# Altium PCB PCB1.PcbDoc
Units mil, origin at the board's own origin, x right, y up, seen from the top; angles counter-clockwise.
Board outline 3937.01 x 2362.2 mil, 2 copper layers (Top Layer, Bottom Layer); 66 components, 50 nets, 242 pads, 80 vias.
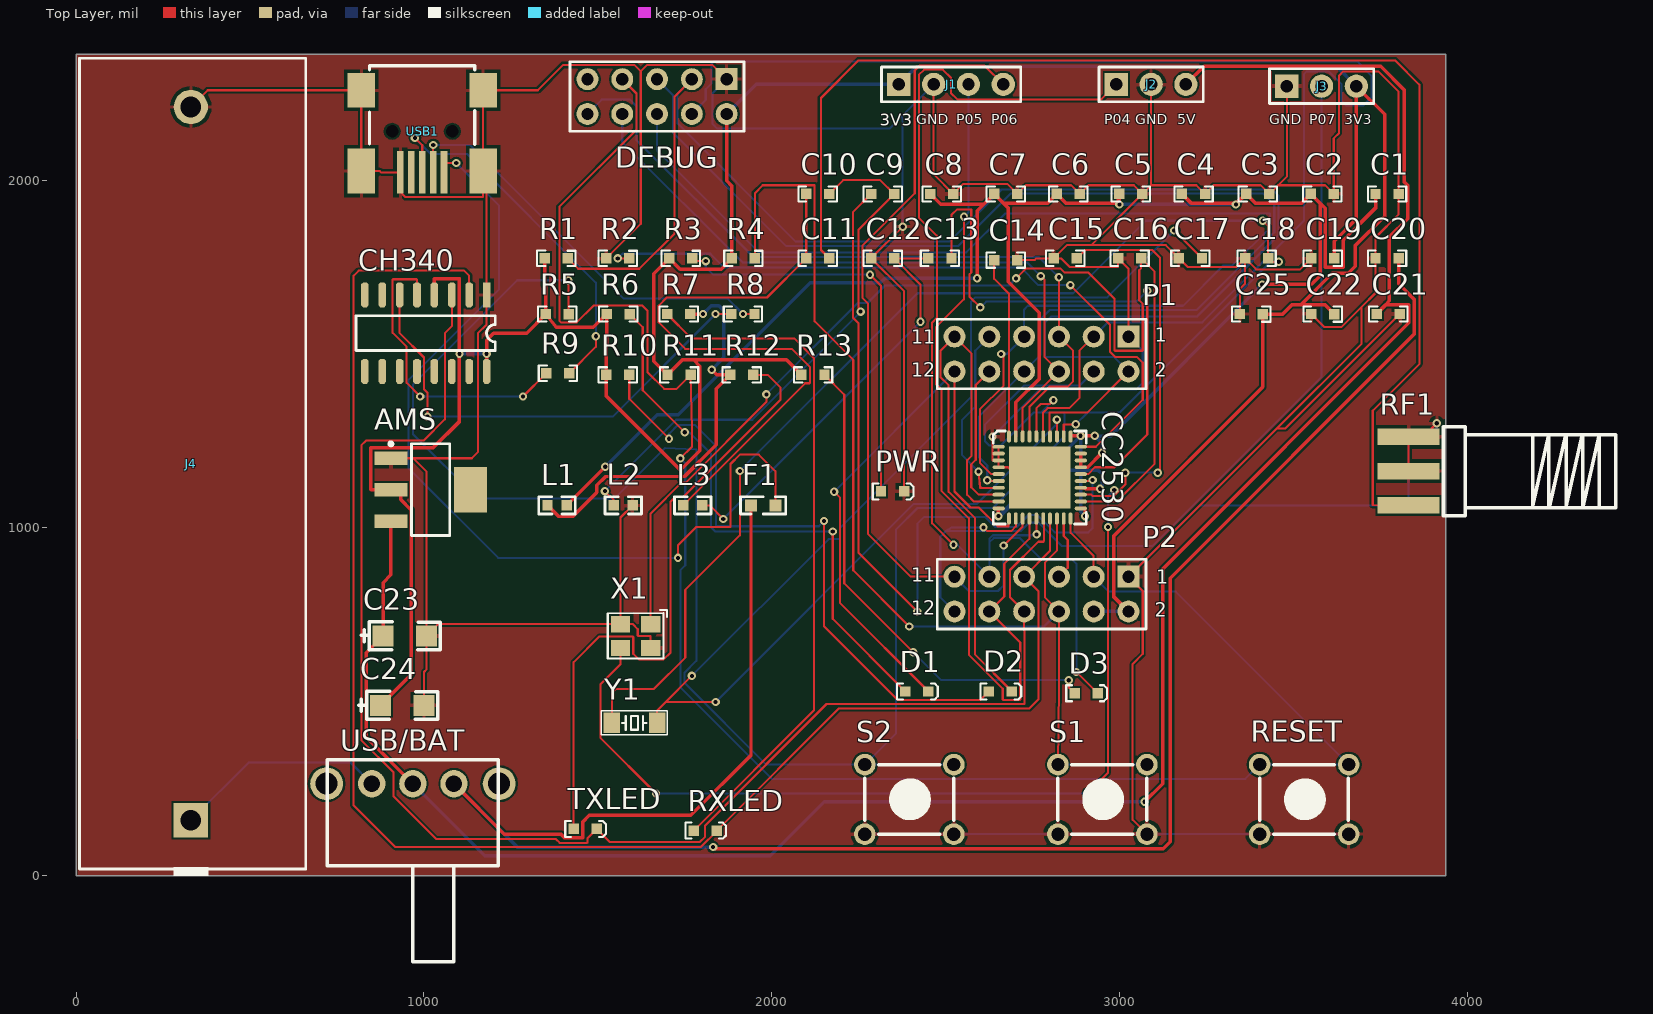
[diagram p0: Top Layer view]
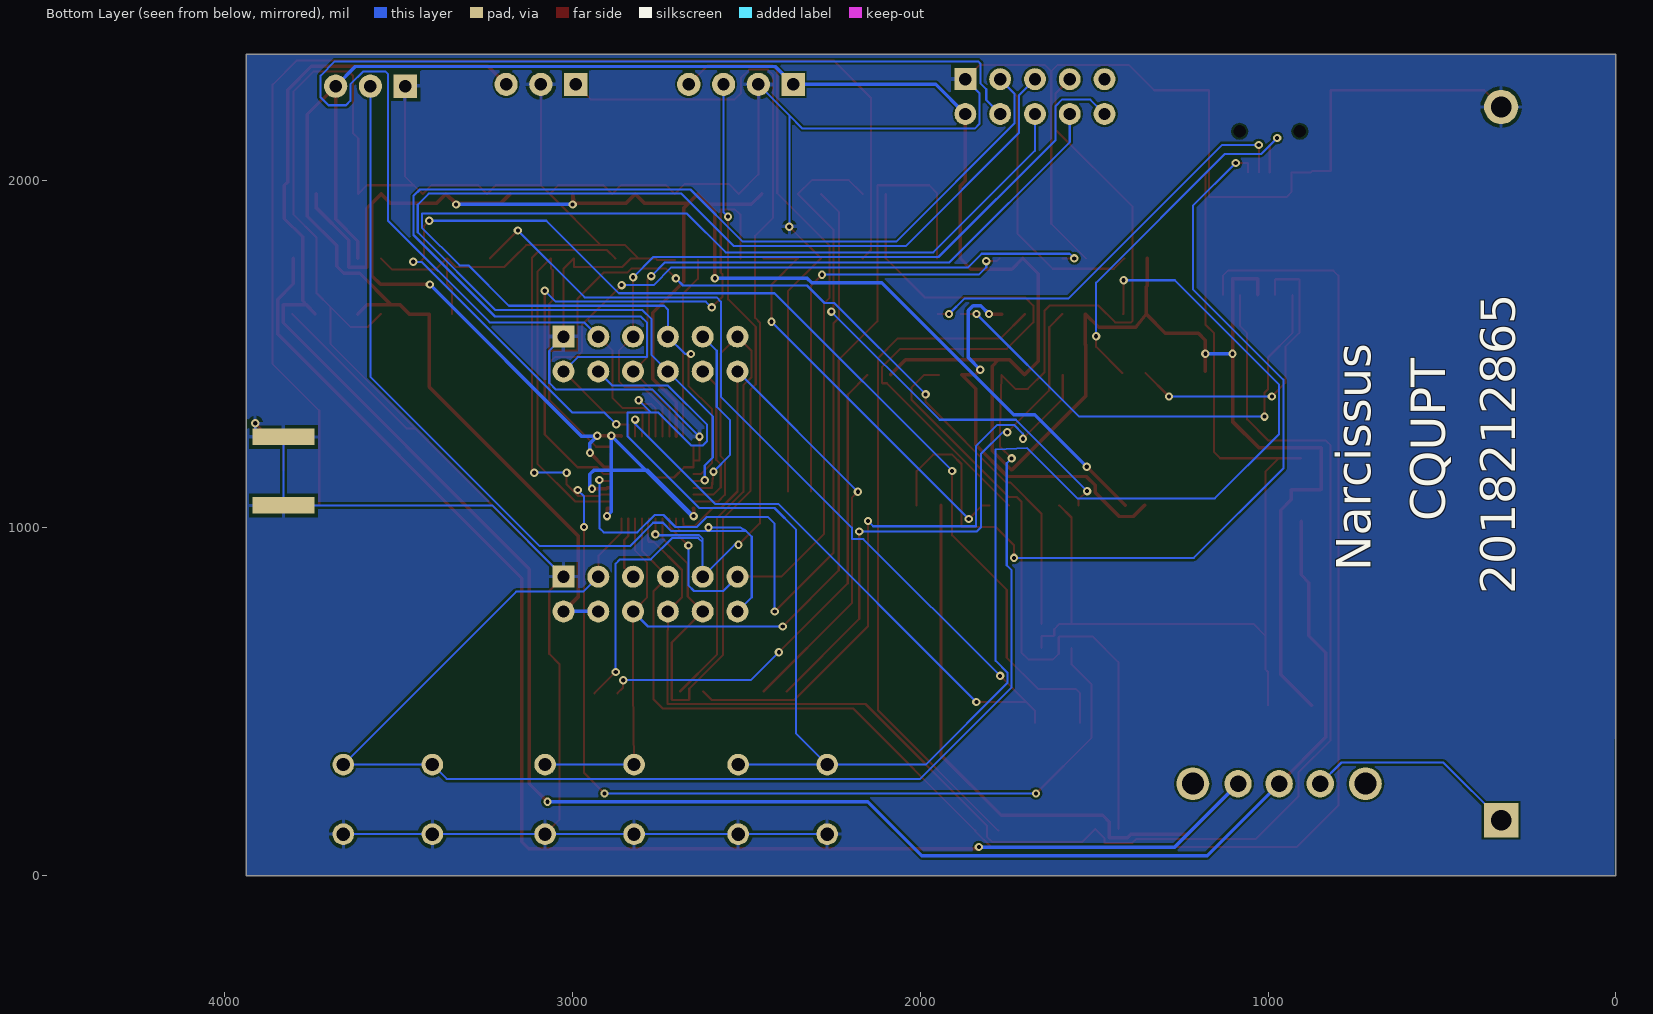
[diagram p1: Bottom Layer view, seen from below]

## Layer stack, top to bottom
Top Solder: solder mask 0.4, Solder Resist, Dk 3.5
Top Layer: signal copper 1.4
Dielectric 1: dielectric 12.6, FR-4, Dk 4.8
Bottom Layer: signal copper 1.4
Bottom Solder: solder mask 0.4, Solder Resist, Dk 3.5

## Board outline
0,0 3937.01,0 3937.01,2362.2 0,2362.2

## Design rules (kind name [scope] priority, off if disabled: settings)
Clearance [All] p1: gap=6 ignorepadtopadclearanceinfootprint=FALSE
PolygonConnect [All] p1: connectstyle=Relief reliefconductorwidth=10 reliefentries=4 polygonreliefangle="90 Angle" airgapwidth=10
RoutingVias [All] p1: holewidth=12 width=24 viastyle="Through Hole" minholewidth=10 minwidth=10 maxholewidth=24 maxwidth=50
SolderMaskExpansion [All] p1: expansion=4
Width Width_1 [(InNet('3V3') OR InNet('VBUS') OR InNet('VCC') OR InNet('VDD3V3') OR InNet('VDD5V'))] p1: maxlimit=10 minlimit=10 preferedwidth=10
Width [All] p2: maxlimit=10 minlimit=6 preferedwidth=6
30 further rules are at their usual default settings.

## Components (designator, comment, footprint, x,y, rotation, side; value= is the part's Value field where it differs from the comment)
AMS "AMS1117" SOT-223-4 905,1200.55 r270 top (schematic designator IC2)
C1 "1uF" C0603 3768.16,1959.97 r0 top
C2 "0.1uF" C0603 3581.84,1960.03 r0 top
C3 "0.1uF" C0603 3396.84,1960.03 r0 top
C4 "0.1uF" C0603 3211.84,1960.03 r0 top
C5 "0.1uF" C0603 3031.84,1960.03 r0 top
C6 "220pF" C0603 2851.84,1960.03 r0 top
C7 "0.1uF" C0603 2671.84,1960.03 r0 top
C8 "2.2uF" C0603 2488.16,1959.97 r0 top
C9 "18pF" C0603 2318.16,1959.97 r0 top
C10 "1pF" C0603 2131.84,1960.03 r180 top
C11 "2.2pF" C0603 2131.84,1775.03 r180 top
C12 "1pF" C0603 2318.16,1774.97 r0 top
C13 "18pF" C0603 2483.16,1774.97 r180 top
C14 "1uF" C0603 2671.84,1770.03 r0 top
C15 "27pF" C0603 2843.16,1774.97 r180 top
C16 "27pF" C0603 3028.16,1774.97 r180 top
C17 "15pF" C0603 3203.16,1774.97 r180 top
C18 "15pF" C0603 3393.16,1774.97 r180 top
C19 "0.1uF" C0603 3583.16,1774.97 r180 top
C20 "0.1uF" C0603 3768.16,1774.97 r180 top
C21 "1uF" C0603 3771.84,1615.03 r0 top
C22 "22pF" C0603 3583.16,1614.97 r180 top
C23 "10uF" CASE-A_3216 945,690 r0 top
C24 "10uF" CASE-A_3216 937.5,490 r0 top
C25 "0.01uF" C0603 3378.16,1614.97 r180 top
CC2530 "CC2530F256" PVQFN-N40 2651.95,1233.58 r0 top (schematic designator IC1)
CH340 "CH340G" SOP16 1180,1670 r180 top
D1 "LED" LED_0603 2416.84,530.03 r0 top
D2 "LED" LED_0603 2656.84,530.03 r0 top
D3 "LED" LED_0603 2903.16,524.97 r0 top
DEBUG "Debug" HDR2.54-LI-2x5P 1670,2240 r180 top (schematic designator P3)
F1 "6V 500MA" "FU 0603" 1975,1065 r0 top
J1 "气体感应" HDR2.54-M-LI-4P 2515,2275 r0 top
J2 "光敏/热敏/继电器" HDR2.54-M-LI-3P 3090,2275 r0 top
J3 "温湿度感应" HDR2.54-M-LI-3P 3580,2270 r0 top
J4 "CON2" 5557-2P 330,160 r90 top
L1 "2nH" 0402 1355,1065 r0 top
L2 "2nH" 0402 1600,1065 r180 top
L3 "2nH" 0402 1745,1065 r0 top
P1 "Header 6X2" HDR2.54-LI-2x6P 2775,1500 r180 top
P2 "Header 6X2" HDR2.54-LI-2x6P 2775,810 r180 top
PWR "LED" LED_0603 2346.84,1105.03 r0 top
R1 "10K" R0603 1380,1775 r0 top
R2 "56K" R0603 1556.84,1775.03 r0 top
R3 "1K" R0603 1738.16,1774.97 r0 top
R4 "10K" R0603 1918.16,1774.97 r0 top
R5 "10K" R0603 1383.16,1614.97 r0 top
R6 "1K" R0603 1558.16,1614.97 r0 top
R7 "1K" R0603 1731.84,1615.03 r0 top
R8 "0R" R0603 1916.84,1615.03 r0 top
R9 "0R" R0603 1385,1445 r0 top
R10 "1K" R0603 1556.84,1440.03 r0 top
R11 "10K" R0603 1733.16,1439.97 r0 top
R12 "1K" R0603 1913.16,1439.97 r180 top
R13 "1K" R0603 2118.16,1439.97 r0 top
RESET "KEY_4P" KEY_6*6 3530,220 r0 top (schematic designator S4)
RF1 "SMA偏角插座" SMA-SMD_HJ-SMA716 3830,1163.43 r90 top
RXLED "LED" LED_0603 1808.16,129.97 r0 top
S1 "KEY_4P" KEY_6*6 2950,220 r0 top
S2 "KEY_4P" KEY_6*6 2395,220 r0 top
TXLED "LED" LED_0603 1463.16,134.97 r0 top
USB1 "Mini USB" "SMT-MINI USB" 995,2140 r270 top
USB/BAT "SW-SPDT" SS-12F23 968.11,265 r270 top (schematic designator S3)
X1 "32MHz" OSC-SMD_4P-L3.2-W2.5-BL 1608.3,689.46 r180 top
Y1 "32K" "OSC 3215-2P" 1604.96,440 r180 top

## Footprints (in the part's own frame and the unit in brackets; to place one, negate y for a bottom-side part, rotate by r counter-clockwise, add the part's x,y. Pads: shape width x height; smd on the part's side, far side on the other; paste and mask are expansions set on the pad)
0402 [mil]
  rect 30x30 smd: 1(0,0) 2(55,0)
  silkscreen extent -25,-25 80,25
5557-2P [mm] "pin 4.2mm"
  rect 2.5x2.5 hole 1.5: 1(0,0)
  round 2.5 hole 1.5: 2(52.07,0)
  silkscreen extent -4.06,-8.38 55.63,8.13
C0603 [mil]
  rect 30x30 smd: 1(-33.16,0.03) 2(33.16,-0.03)
  silkscreen extent -55,-22 55,22, body extent -31,-15 32,17, height 12
CASE-A_3216 [mil]
  rect 60x60 smd: 1(-62.5,0) 2(62.5,0)
  silkscreen extent -125,-40 102,40, body extent -72,-32 78,31, height 63
"FU 0603" [mil] "贴片保险丝"
  rect 35x35 smd: 1(-35,0) 2(35,0)
  silkscreen extent -65,-25 65,25, body extent -31,-16 31,16, height 20
HDR2.54-LI-2x5P [mm] "双排排针，5x2脚 淘宝ID:黄晶宝石   店铺网址:https://shop463601444.taobao.com"
  rect 1.6x1.6 hole 0.9: 1(-5.08,-1.27)
  round 1.6 hole 0.9: 2(-5.08,1.27) 3(-2.54,-1.27) 4(-2.54,1.27) 5(0,-1.27) 6(0,1.27) 7(2.54,-1.27) 8(2.54,1.27) 9(5.08,-1.27) 10(5.08,1.27)
  silkscreen extent -6.35,-2.54 6.35,2.54, body extent -6.35,-2.54 6.35,2.54, height 8.5
HDR2.54-LI-2x6P [mm] "双排排针，6x2脚 淘宝ID:黄晶宝石   店铺网址:https://shop463601444.taobao.com"
  rect 1.6x1.6 hole 0.9: 1(-6.35,-1.27)
  round 1.6 hole 0.9: 2(-6.35,1.27) 3(-3.81,-1.27) 4(-3.81,1.27) 5(-1.27,-1.27) 6(-1.27,1.27) 7(1.27,-1.27) 8(1.27,1.27) 9(3.81,-1.27) 10(3.81,1.27) 11(6.35,-1.27) 12(6.35,1.27)
  silkscreen extent -7.62,-2.54 7.62,2.54, body extent -7.62,-2.54 7.62,2.54, height 8.5
HDR2.54-M-LI-3P [mm] "排母，3脚   淘宝ID:黄晶宝石   店铺网址:https://shop463601444.taobao.com"
  rect 1.7x1.7 hole 0.9: 1(-2.54,0)
  round 1.7 hole 0.9: 2(0,0) 3(2.54,0)
  silkscreen extent -3.81,-1.27 3.81,1.27, body extent -3.81,-1.27 3.81,1.27, height 8.5
HDR2.54-M-LI-4P [mm] "排母，4脚  淘宝ID:黄晶宝石   店铺网址:https://shop463601444.taobao.com"
  rect 1.7x1.7 hole 0.9: 1(-3.81,0)
  round 1.7 hole 0.9: 2(-1.27,0) 3(1.27,0) 4(3.81,0)
  silkscreen extent -5.08,-1.27 5.08,1.27, body extent -5.08,-1.27 5.08,1.27, height 8.5
KEY_6*6 [mil]
  round 62 hole 38: 1(-127.95,100) 1(127.95,100) 2(-127.95,-100) 2(127.95,-100)
  silkscreen extent -128,-100 127,100, body extent -132,-123 126,121, height 197
LED_0603 [mil]
  rect 30x30 smd: 1(-33.15,0.03) 2(33.16,-0.03)
  silkscreen extent -57,-23 60,23, body extent -32,-15 31,16, height 18
"OSC 3215-2P" [mm] "3.2*1.5*0.6mm(长宽高)                      淘宝ID:黄晶宝石"
  rect 1.2x1.5 smd: 1(-1.65,0) 2(1.65,0)
  silkscreen extent -2.41,-0.89 2.41,0.89, body extent -1.6,-0.75 1.6,0.75, height 0.61
OSC-SMD_4P-L3.2-W2.5-BL [mm]
  rect 1.4x1.2 smd: 1(-1.1,-0.875) 2(1.1,-0.875) 3(1.1,0.875) 4(-1.1,0.875)
  silkscreen extent -2.29,-1.9 2.03,1.65
PVQFN-N40 [mm]
  oval 0.889x0.28 smd: 1(0,0) 2(0,-0.5) 3(0,-1) 4(0,-1.5) 5(0,-2) 6(0,-2.5) 7(0,-3) 8(0,-3.5) 9(0,-4) 10(0,-4.5) 21(5.994,-4.5) 22(5.994,-4) 23(5.994,-3.5) 24(5.994,-3) 25(5.994,-2.5) 26(5.994,-2) 27(5.994,-1.5) 28(5.994,-1) 29(5.994,-0.5) 30(5.994,0)
  oval 0.28x0.889 smd: 11(0.748,-5.248) 12(1.248,-5.248) 13(1.748,-5.248) 14(2.248,-5.248) 15(2.748,-5.248) 16(3.248,-5.248) 17(3.748,-5.248) 18(4.248,-5.248) 19(4.748,-5.248) 20(5.248,-5.248) 31(5.248,0.749) 32(4.748,0.749) 33(4.248,0.749) 34(3.748,0.749) 35(3.248,0.749) 36(2.748,0.749) 37(2.248,0.749) 38(1.748,0.749) 39(1.248,0.749) 40(0.748,0.749)
  rect 4.5x4.5 smd: 41(2.998,-2.25)
  silkscreen extent -0.4,-5.65 6.4,1.15
R0603 [mil]
  rect 30x30 smd: 1(-33.16,0.03) 2(33.16,-0.03)
  silkscreen extent -55,-22 55,22, body extent -32,-15 31,16, height 18
SMA-SMD_HJ-SMA716 [mm]
  rect 1.2x4.5 smd: 1(0,0) 2(-2.5,0) 3(2.5,0)
  rect 1.2x4.5 smd far side: 4(-2.5,0) 5(2.5,0)
  silkscreen extent -3.25,-15.14 3.25,-2.54
"SMT-MINI USB" [mm]
  rect 3.1x0.5 smd: 1(3,1.6) 2(3,0.8) 3(3,0) 4(3,-0.8) 5(3,-1.6)
  rect 3.3x2 smd: 6(2.9,-4.45) 8(2.9,4.45)
  rect 2.5x2 smd: 7(-3,-4.45) 9(-3,4.45)
  rect 0x0 hole 0.9: 10(0,2.2) 11(0,-2.2)
  silkscreen extent -4.8,-3.85 0.95,3.85
SOP16 [mil]
  rect 22x72 smd: 1(0,0)
  oct 22x72 smd: 2(50,0) 3(100,0) 4(150,0) 5(200,0) 6(250,0) 7(300,0) 8(350,0) 9(350,220) 10(300,220) 11(250,220) 12(200,220) 13(150,220) 14(100,220) 15(50,220) 16(0,220)
  silkscreen extent -25,60 375,160
SOT-223-4 [mm] "SOT223, 4-Leads, Body 6.50x7.00mm (avg), Pitch 2.30mm, IPC Medium Density"
  rect 1x2.4 smd: 1(0,0) 2(2.3,0) 3(4.6,0)
  rect 3.3x2.4 smd: 4(2.3,5.8)
  silkscreen extent -1.17,-0.12 5.65,4.3, body extent -1.05,1.05 5.65,4.75, height 1.8
SS-12F23 [mm] "脚距3mm"
  round 2.4 hole 1.6: 0(0,6.3) 0(0,-6.3)
  round 2 hole 1.2: 1(0,3) 2(0,0) 3(0,-3)
  silkscreen extent -1.75,-6.25 13,6.25, body extent -0.61,-6.52 12.29,6.48, height 5.75

## Part data
C1 C2 C3 C4 C5 C6 C7 C8 C9 C10 C11 C12 C13 C14 C15 C16 C17 C18 C19 C20 C21 C22 C25: library part CAP, "Capacitor"
C23 C24: library part "Cap Pol2", "钽电容"
CC2530: library part CC2530
DEBUG: library part "Header 5X2", "Header, 5-Pin, Dual row"
F1: library part FUSE, "保险丝"
J1: library part CON4, "连接器"
J2 J3: library part CON3, "连接器"
J4: "连接器"
L1 L2 L3: library part INDUCTOR
P1 P2: "Header, 6-Pin, Dual row"
R1 R3 R4 R5 R6 R7 R8 R9 R10 R11 R12 R13: library part RES2
R2: library part RES
RESET S1 S2: "轻触按键4P"
RF1: BOM_Manufacturer Part=间距1.6MM, BOM_Supplier Part=https://detail.tmall.com/item.htm?spm=a1z10.3-b.w4011-9244759072.35.2c2a2fb4qDqj1h&id=529515511096&rn=ee1f73c36cd3b95b005e96697d488f37&abbucket=11&skuId=3191543860831, Contributor=NarcissusLZ, spicePre=R, spiceSymbolName=SMA偏角插座
USB1: library part USB-1, "IC", Manufacturer Part Number="USB Plug P/N: MUSB-B5-S-VT-02", ComponentLink1Description="Manufacturer Link", Published=NOV.13,2009, Publisher1="Stephen Lui", Publisher2=Tianshen
USB/BAT: "拨动开关", ComponentLink1Description="Manufacturer Link", ComponentLink1URL=http://www.apem.com, DatasheetVersion=05-Dec-2000, LatestRevisionDate=17-Dec-2003, LatestRevisionNote="Schematic revised, PCB Footprint replaced.", PackageDescription="Switch; 4 Leads", PackageReference=TL36WW15050, Published=24-Mar-1999, Publisher="Altium Limited"
X1: BOM_Manufacturer Part="32Mhz (5个)", BOM_Supplier Part=https://detail.tmall.com/item.htm?spm=a1z10.3-b-s.w4011-21581912015.62.25615535szrVfW&id=524364517124&rn=6fc20a06caf5be9e882cd070f02ad4b3&abbucket=11&skuId=3184916323459, nameAlias=Frequency, spicePre=X, spiceSymbolName=X322532MOB4SI
Y1: library part CRYSTAL, "Crystal"
CH340: 唯一出售店铺网址=https://shop463601444.taobao.com, 技术支持，联系售后="封装库来自淘宝卖家 ID：黄"

## Via types
v1: diameter 24, hole 12, Top Layer to Bottom Layer, 80 vias

## Nets (pads, with @x,y where several pads share a name; then routed paths per layer and width w, separated by ;. In a path a pad name is that pad's centre, name@x,y a point inside that pad or via, vN(x,y) a via of type N, cw(c..) or ccw(c..) an arc to the next point about the centre after c; other vN are vias at no path point)
3V3: C1.1 C2.1 C3.1 C4.1 C5.1 C6.1 C7.1 C8.1 CC2530.10 CC2530.21 CC2530.24 CC2530.27 CC2530.28 CC2530.29 CC2530.31 CC2530.39 L1.2 | length 6760.3
  Top Layer w10: L1.2 v1(1521,1176) ; C8.1 2485,1930 2608.63,1930 ; v1(2590,1718) 2590,1911.37 2608.63,1930 ; v1(2651,1034) 2651,1056.42 CC2530.10 ; CC2530.39 2701.1,1361.21 2768,1428.11 2768,1618.25 2678.97,1707.28 2678.97,1919.78 2664.75,1934 ; CC2530.31 2858.58,1265 v1(2887.5,1265) v1(2928,1265) ; CC2530.21 2900,1056.42 v1(2900,1034) ; CC2530.24 2899,1115.47 2901.47,1113 v1(2943,1113) ; CC2530.29 CC2530.28 CC2530.27 2907.53,1174.53 v1(2949,1216) ; v1(2998.69,1930) C5.1 2994.69,1934 2844.75,1934 C6.1 2792.63,1934 2664.75,1934 ; C4.1 3204.75,1934 3333.63,1934 C3.1 ; v1(3333.63,1930) C3.1 ; v1(3409,1700) 3551,1700 3576,1725 3576,1932.75 ; C1.1 3735,1919.69 3642.31,1827 3642.31,1750 3641.25,1748.94 3591,1748.94 3590,1749.94 3590,1918.75 3576,1932.75 ; 2608.63,1930 C7.1 2664.75,1934 ; C3.1 3389.75,1934 3522.63,1934 C2.1 3576,1932.75
  Bottom Layer w10: v1(1521,1176) 1671,1326 1731,1326 2110,1705 2312,1705 2325,1718 v1(2590,1718) ; v1(2900,1034) 2887.5,1046.5 2887.5,1166.5 ; v1(2928,1265) v1@2930,1263 ; v1(2943,1113) 2950,1120 2950,1154 2937.5,1166.5 2887.5,1166.5 ; v1(2949,1216) 2949,1244 v1@2930,1263 ; v1(2998.69,1930) v1(3333.63,1930) ; v1(3409,1700) 2972,1263 v1@2930,1263 ; 2789,1166.5 v1(2887.5,1265) 2887.5,1166.5 ; 2789,1166.5 2656.5,1034 v1(2651,1034) 2783.5,1166.5 2789,1166.5 ; 2789,1166.5 2887.5,1166.5
GND: AMS.1 C1.2 C2.2 C3.2 C4.2 C5.2 C6.2 C7.2 C8.2 C12.1 C14.2 C15.2 C16.2 C17.2 C18.2 C19.2 C20.2 C21.2 C22.2 C23.2 C24.2 C25.2 CC2530.1 CC2530.2 CC2530.3 CC2530.4 CC2530.41 CH340.1 DEBUG.1 J1.2 J2.2 J3.1 J4.2 L2.1 P1.1 P2.1 PWR.2 R2.1 RESET.2 RF1.1 RF1.3 RF1.4 RF1.5 S1.2 S2.2 USB1.5 USB1.6 USB1.7 USB1.8 USB1.9 X1.2 X1.4 | length 19036.9
  Top Layer w6: J4.2 378.11,2258.11 USB1.7 USB1.6 873,2025.83 876.94,2021.89 USB1.5 932.01,1965.99 947,1951 1169.2,1951 1170.2,1952 USB1.8 ; AMS.1 968.95,1200.55 ; C24.2 1000,586 1007.5,593.5 C23.2 ; R2.1 1570.22,1821.59 1623,1874.37 1623,2312.5 ; L2.1 1565,1030 X1.2 ; X1.4 1651.61,689 1650.61,690 1615.56,690 1614.56,691 1614.56,709.33 1600,723.9 X1.2 ; DEBUG.1 1829,2331 1641.5,2331 1623,2312.5 ; v1(2376,1866) C12.1 2380,1680 PWR.2 ; J1.2 2465,2016.25 C8.2 2550.38,1989 2676,1989 C7.2 2730,1985 2860,1985 C6.2 2910,1985 3040,1985 C5.2 ; v1(2634,1262.5) 2634,1194.21 CC2530.3 ; CC2530.1 CC2530.2 CC2530.3 ; C14.2 2755,1770 2760,1775 C15.2 ; CC2530.41 2707.53,1145 2678,1174.53 CC2530.4 CC2530.3 ; P1.1 3025,1745 C16.2 2995,1751 2994,1750 2856,1750 2831,1775 C15.2 ; S1.2@3077.95,120 3037,160.95 3037,609 3066,638 3066,819 P2.1 3450.91,1285.91 ; J2.2 3090,1985 ; C25.2 3345,1687 3360,1702 C18.2 ; J3.1 3480,2010 3455,1985 ; C22.2 3587,1578 3637.5,1578 3695,1635.5 ; C19.2 3518.19,1743.19 3391.81,1743.19 C18.2 ; C21.2 3475.91,1285.91 3450.91,1285.91 ; RF1.1 RF1.3 3896,1261.85 3896,1286 v1(3911,1301) ; 968.95,1200.55 1137.5,1200.55 1155,1218.05 1155,1560 1180,1585 CH340.1 1180,2016.02 USB1.8 ; 968.95,1200.55 1007.5,1162 C23.2 ; C23.2 1041.4,723.9 X1.2 ; USB1.8 USB1.9 1327.11,2258.11 1400,2331 1604.5,2331 1623,2312.5 ; C15.2 2848,1813 2918,1813 ; 2918,1813 3132,1813 C17.2 3195,1750 3335,1750 C18.2 ; 2918,1813 C5.2 ; C5.2 3090,1985 ; 3090,1985 3220,1985 C4.2 3270,1985 3405,1985 C3.2 3455,1985 ; 3450.91,1285.91 3695,1530 3695,1635.5 ; 3455,1985 3590,1985 C2.2 3615,2120 3630,2135 3630,2300 3642.5,2312.5 3743,2312.5 3801.31,2254.19 C1.2 3801.31,1901.31 3735,1835 C20.2 3735,1675.5 3695,1635.5
  Bottom Layer w6: DEBUG.1 1829,2249 1829,2162.5 1843.5,2148 2338,2148 2376,2186 ; S2.2@2267.05,120 2522.95,120 2822.05,120 3077.95,120 3402.05,120 RESET.2@3657.95,120 ; v1(2376,1866) 2376,2186 ; J1.2 2376,2186 ; v1(2634,1262.5) 2769,1397.5 3046.5,1397.5 3066,1417 3066,1509 P1.1 ; P2.1 3230,1065 RF1.4 RF1.5 3911,1261.85 v1(3911,1301)
NetC9_1: C9.1 CC2530.25 | length 2287.6
  Top Layer w6: C9.1 2233.71,1908.71 2233.71,1603.72 2249,1588.43 2249,929 v1(2418,760) ; CC2530.25 2919.16,1135.16 v1(2922,1138)
  Bottom Layer w6: v1(2418,760) 2418,1012.5 2437.5,1032 2612.5,1032 2641.5,1003 2703,1003 2737.5,1037.5 2762.5,1037.5 2812.5,987.5 2909.5,987.5 2922,1000 v1(2922,1138)
NetC9_2: C9.2 C10.1 L2.2 | length 1602.4
  Top Layer w6: v1(1520,1106) 1545,1081 L2.2 ; C10.1 2205,2000 2311.25,2000 C9.2 2249,1857.62 2249,1628 v1(2255,1622)
  Bottom Layer w6: v1(1520,1106) 1725,1311 1944,1311 v1(2255,1622)
NetC10_2: C10.2 C11.2 L3.1 | length 1756.5
  Top Layer w6: L3.1 2096,1416 2108,1416 2109,1417 2109,1463 2057,1515 1750.69,1515 1674.69,1591 1674.69,1639 1698.19,1662.5 1986.13,1662.5 C11.2 C10.2
NetC11_1: C11.1 RF1.2 | length 3631.2
  Top Layer w6: C11.1 2141,1799 2141,2236 2249,2344 3791.1,2344 3861,2274.1 3861,1471 3727,1337 3727,1066 RF1.2
NetC12_2: C12.2 C13.2 L3.2 | length 1190
  Top Layer w6: L3.2 1821,1065 v1(1860,1026) ; v1(2427,1593) 2427,1699.25 C12.2 2400,1774.94 2400.06,1775 C13.2
  Bottom Layer w6: v1(1860,1026) v1(2427,1593)
NetC13_1: C13.1 CC2530.26 | length 1636.1
  Top Layer w6: C13.1 2516.31,1900 2532.31,1916 2572,1916 2573,1915 2573,1734 2568,1729 2568,1665 v1(2599,1634) ; CC2530.26 2908.84,1154.84 2928.47,1174.47 2984.76,1174.47 3079,1268.71 v1(3079,1682)
  Bottom Layer w6: v1(2599,1634) 2615.68,1650.68 3047.68,1650.68 v1(3079,1682)
NetC14_1: C14.1 CC2530.40 | length 524.7
  Top Layer w6: C14.1 2638.69,1716.19 2681.42,1673.46 CC2530.40
NetC15_1: C15.1 CC2530.23 X1.3 | length 3817.6
  Top Layer w6: X1.3 1565,608 1507,550 1507,397 v1(1667,237) ; C15.1 2900.38,1799 3093,1799 3116,1776 3116,1166 v1(3109,1159) ; CC2530.23 2918,1095.79 2921.79,1092 2983,1092 2984,1093 ; v1(2907,237) 2966,296 v1(2966,1003) ; v1(2984,1109) 2984,1093 ; v1(3016,1159) 3016,1125 2984,1093
  Bottom Layer w6: v1(1667,237) v1(2907,237) ; v1(2966,1003) 2966,1091 v1(2984,1109) ; v1(3016,1159) v1(3109,1159)
NetC16_1: C16.1 CC2530.22 X1.1 | length 3355.8
  Top Layer w6: X1.1 1651.61,1041.61 1741.29,1131.29 1753.34,1131.29 1984.31,1362.26 v1(1984.31,1384) ; v1(2702,1717.5) 2730,1745.5 2830,1745.5 2841.5,1734 2910,1734 2984.5,1659.5 2984.5,1511 2986,1509.5 3065,1509.5 3066,1510.5 3066,1644.14 3056,1654.14 3056,1741 3061.31,1746.31 C16.1 3100,1736.25 3100,1184.43 2991.67,1076.1 CC2530.22
  Bottom Layer w6: v1(1984.31,1384) 2246.98,1646.67 2274.67,1646.67 2325,1697 2681.5,1697 v1(2702,1717.5)
NetC17_1: C17.1 CC2530.33 Y1.1 | length 3900.7
  Top Layer w6: Y1.1 1669.92,474.92 1695,500 ; v1(1770,575) 1695,500 ; v1(1838.31,500) 1695,500 ; CC2530.33 v1(2819.21,1311.5) ; v1(3156.25,1855) C17.1
  Bottom Layer w6: v1(1770,575) 2163.04,968.04 2195,968.04 2196,969.04 2196,1001 2572.5,1377.5 2572.5,1650.2 2584.98,1662.68 2963.92,1662.68 v1(3156.25,1855) ; v1(1838.31,500) 2407.81,1069.5 2589.71,1069.5 2819.21,1299 v1(2819.21,1311.5)
NetC18_1: C18.1 CC2530.32 Y1.2 | length 3735.5
  Top Layer w6: Y1.2 1540,525 1552.5,537.5 1661,537.5 1751,627.5 1751,822 1908,979 v1(1908,1164) ; CC2530.32 2838.9,1297 v1(2873.5,1298) ; v1(3411,1883) 3426.31,1867.69 C18.1 3436.25,1765 v1(3457,1765)
  Bottom Layer w6: v1(1908,1164) 2418.69,1674.69 2866,1674.69 3074.31,1883 v1(3411,1883) ; v1(2873.5,1298) 2907.5,1332 3000,1332 3433,1765 v1(3457,1765)
NetD1_1: D1.1 R6.2 | length 1618.7
  Top Layer w6: R6.2 1628.78,1577.47 1628.78,1395.72 v1(1749.5,1275) ; v1(2175,990) 2175,738.75 D1.1
  Bottom Layer w6: v1(1749.5,1275) 1763,1275 1825,1213 1825,1002.5 1837.5,990 v1(2175,990)
NetD2_1: D2.1 R10.2 | length 1837.2
  Top Layer w6: R10.2 1590,1371 v1(1704.5,1256.5) ; v1(2150,1020) 2150,717 2361,506 2599.63,506 D2.1
  Bottom Layer w6: v1(1704.5,1256.5) 1704.5,1271 1730,1296.5 1778.5,1296.5 1839,1236 1839,1006 1840,1005 2135,1005 v1(2150,1020)
NetD3_1: D3.1 R13.2 | length 1427.6
  Top Layer w6: R13.2 2208,1383.25 2208,841 v1(2406,643) ; v1(2853.5,562.5) 2853.5,541.5 D3.1
  Bottom Layer w6: v1(2406,643) 2486.5,562.5 v1(2853.5,562.5)
NetF1_2: F1.2 USB1.1 | length 2627
  Top Layer w6: USB1.1 1057.99,2049 v1(1093,2049) ; v1(1730,914) 1730,950 1783,1003 1880,1003 1881,1004 1881,1184.03 1907.97,1211 1962.5,1211 2010,1163.5 F1.2
  Bottom Layer w6: v1(1093,2049) 1216,1926 1216,1686 956,1426 956,1171 1213,914 v1(1730,914)
NetIC1_30: CC2530.30 R2.2 | length 2062.9
  Top Layer w6: v1(1557,1775) R2.2 ; v1(2858,1698) 2972,1584 2972,1506.5 2987.5,1491 3050,1491 3066,1475 3066,1368.68 2930.9,1233.58 CC2530.30
  Bottom Layer w6: v1(1557,1775) 1570.15,1788.15 1823,1788.15 1861.94,1749.21 2714.79,1749.21 2766,1698 v1(2858,1698)
NetJ4_1: J4.1 USB/BAT.3 | length 614
  Bottom Layer w6: J4.1 496,326 789,326 USB/BAT.3
NetPWR_1: PWR.1 R3.2 | length 1176.7
  Top Layer w6: R3.2 1779.25,1767 v1(1810,1767) ; v1(2282,1728) 2313.69,1696.31 PWR.1
  Bottom Layer w6: v1(1810,1767) 1810,1749 1831,1728 v1(2282,1728)
NetR7_1: R7.1 RXLED.1 | length 1976.3
  Top Layer w6: R7.1 1768.75,1545 2064,1545 2121,1488 2121,476 RXLED.1
NetR8_2: R8.2 USB1.2 | length 1203.9
  Top Layer w6: USB1.2 v1(1026.5,2101) ; v1(1917,1615) R8.2
  Bottom Layer w6: v1(1026.5,2101) 1132,2101 1573,1660 1872,1660 v1(1917,1615)
NetR9_2: R9.2 USB1.3 | length 1091.6
  Top Layer w6: v1(974,2121) 995,2100 USB1.3 ; R9.2 1494,1520.81 v1(1494,1551)
  Bottom Layer w6: v1(974,2121) 1020,2075 1124,2075 1494,1705 v1(1494,1551)
NetR12_1: R12.1 TXLED.1 | length 1851
  Top Layer w6: TXLED.1 1430,614 1504,688 1599.62,688 1601.56,686.06 1601.56,638.44 1617.62,622.38 1689,622.38 1708.53,641.91 1708.53,1075.53 1722,1089 1744.82,1089 2025,1369.18 2025,1403.18 1988.25,1439.94 R12.1
P0_0: CC2530.19 P2.5 | length 182.4
  Top Layer w6: P2.5 2850.52,885.52 2850.52,965.38 2838.9,977 CC2530.19
P0_1/BTN1: CC2530.18 P2.6 R4.2 S1.1 | length 3190.5
  Top Layer w6: R4.2 1951.31,1962.5 1973.81,1985 2122,1985 2123,1984 2123,1594 2233.94,1483.06 2233.94,878.06 v1(2395,717) ; CC2530.18 2819.21,934.71 2784.5,900 2784.5,800.5 P2.6 2825,542.95 S1.1@2822.05,320
  Bottom Layer w6: v1(2395,717) 2782,717 P2.6 ; S1.1@2822.05,320 S1.1@3077.95,320
P0_2/RX: CC2530.17 CH340.2 P2.7 RXLED.2 | length 4683.2
  Top Layer w6: CH340.2 1130,1725 1115.5,1739.5 812.5,1739.5 798,1725 798,202.5 917.5,83 1795.62,83 1841.31,128.69 RXLED.2 2192.38,481 2740,481 2766,507 2766,819 P2.7 2799.53,934.53 CC2530.17
P0_3/TX: CC2530.16 CH340.3 P2.8 TXLED.2 | length 4376.4
  Top Layer w6: CH340.3 1080,1580 1060,1560 1060,1312.5 999,1251.5 834,1251.5 820,1237.5 820,390 912.5,297.5 912.5,228.5 1035,106 1379,106 1390,95 1469,95 1470,96 1470,108.62 TXLED.2 1533.25,98 1793.5,98 1808,112.5 1808,145 2157,494 2725,494 2726,495 2726,706 2725,707 P2.8 2684.5,800.5 2684.5,879.17 2765.84,960.5 2780.1,960.5 2782.47,962.87 2782.47,1018.34 2779.84,1018.34 CC2530.16
P0_4/BTN2: CC2530.15 D3.2 J2.1 P2.9 | length 3176.2
  Top Layer w6: v1(2522,952) 2460.5,1013.5 2460.5,1590.5 2474,1603.99 2474,1840 2422.53,1891.47 2422.53,2302.5 2437.5,2317.47 2491.53,2317.47 2515,2294 2515,2250 2533,2232 2947,2232 J2.1 ; CC2530.15 2760.16,982.34 v1(2761,981.5) ; v1(2875,586.25) D3.2
  Bottom Layer w6: v1(2522,952) 2533,952 P2.9 2625,958.5 ; v1(2761,981.5) 2758.5,979 2635,979 2625,969 2625,958.5 ; v1(2875,586.25) 2875,897.5 2862.5,910 2774,910 2713,971 2637.5,971 2625,958.5
P0_5/BUT3: CC2530.14 J1.3 P2.10 | length 2541.4
  Top Layer w6: v1(2552,1895) 2552,1657.5 2472.5,1578 2472.5,1413 2488,1397.5 2488,1106 2566,1028 2566,635.75 2663.5,538.25 2663.5,507 2664.5,506 2713,506 2714,507 2714,671 P2.10 2668,803 2668,897 2740,969 2740,1015.01 2740.47,1015.48 CC2530.14
  Bottom Layer w6: v1(2552,1895) 2565,1908 J1.3
P0_6: CC2530.13 J1.4 P2.11 | length 2362.4
  Top Layer w6: P2.11 2399,860 2276,983 2276,1645.72 2261,1660.72 2261,1812.5 2410.53,1962.03 2410.53,2315 2425,2329.47 2610.53,2329.47 J1.4 ; v1(2666,949.5) 2720.79,1004.29 CC2530.13
  Bottom Layer w6: P2.11 2566,819 2650,819 2666,835 v1(2666,949.5)
P0_7: CC2530.12 J3.2 P2.12 | length 2645.8
  Top Layer w6: v1(2608.24,1001.76) 2619,991 2687.5,991 2701.1,1004.6 CC2530.12
  Bottom Layer w6: P2.12 2484,801 2484,975 2500,991 ; v1(2608.24,1001.76) 2516.76,1001.76 2500,991 ; J3.2 3580,1435 3093,948 2834,948 2767,1015 2739,1015 2715,991 2500,991
P1_0: CC2530.11 D1.2 P1.12 | length 1739.5
  Top Layer w6: v1(2179,1104) 2196,1087 2196,784 D1.2 ; P1.12 2525,1104.91 2570.91,1059 2595,1059 2649,1005 2680.42,1005 CC2530.11
  Bottom Layer w6: v1(2179,1104) P1.12
P1_1: CC2530.9 D2.2 P1.11 | length 1701
  Top Layer w6: CC2530.9 2580.53,1076.1 2561,1095.63 2561,1195.14 2574,1208.14 2574,1501 P1.11 2484.5,1509.5 2484.5,1433.23 2508,1409.73 2508,1104 2584,1028 2584,636 D2.2
P1_2: CC2530.8 P1.10 | length 442.3
  Top Layer w6: P1.10 2586,1411 2586,1196 2573,1183 2573,1117 2594.21,1095.79 CC2530.8
P1_3: CC2530.7 P1.9 | length 540.4
  Top Layer w6: v1(2594,1162) 2599,1115.47 CC2530.7
  Bottom Layer w6: v1(2594,1162) 2546,1210 2546,1310 2584.5,1348.5 2584.5,1509.5 P1.9
P1_4/CSN: CC2530.6 DEBUG.5 P1.8 | length 3546.4
  Top Layer w6: v1(2619,1137) 2620.84,1135.16 CC2530.6
  Bottom Layer w6: DEBUG.5 1715.84,2244.16 1715.84,2135.84 2041.68,1810 2535,1810 2686,1961 3412.5,1961 3444,1929.5 3444,1850 3220.68,1626.68 2798.18,1626.68 2772.5,1601 2772.5,1497.5 P1.8 2596,1321 2596,1202.46 2619,1179.46 v1(2619,1137)
P1_5/SCLK: CC2530.5 DEBUG.6 P1.7 | length 3455.7
  Top Layer w6: CC2530.5 2631,1154.84 2598,1187.84 2598,1341 2666,1409 2666,1493 v1(2659,1500)
  Bottom Layer w6: DEBUG.6 1670,2084 1962,1792 2559,1792 2671,1904 3431,1904 3432,1903 3432,1863 3323.72,1754.72 3298.07,1754.72 3182.02,1638.68 2735.68,1638.68 2725,1628 P1.7 2675,1500 v1(2659,1500)
P1_6/MOSI: CC2530.38 DEBUG.8 P1.6 | length 1969.1
  Top Layer w6: CC2530.38 2720.79,1345.79 P1.6 2784,1491 2784,1713 v1(2773,1724)
  Bottom Layer w6: DEBUG.8 1570,2109 1916,1763 2734,1763 v1(2773,1724)
P1_7/MISO: CC2530.37 DEBUG.10 P1.5 | length 2197.6
  Top Layer w6: CC2530.37 2740.47,1348.47 2798,1406 2850,1406 2866,1422 2866,1509 P1.5 v1(2825,1720.74)
  Bottom Layer w6: DEBUG.10 1511,2231 1592.5,2231 1611,2212.5 1611,2115 1947,1779 2766.74,1779 v1(2825,1720.74)
P2_0/BTN2: CC2530.36 P1.4 R5.2 S2.1 | length 5580.4
  Top Layer w6: v1(1415,1712) 1415,1616.25 R5.2 ; CC2530.36 2760.16,1343.87 2772.79,1356.5 2798.21,1356.5 v1(2809,1367.29)
  Bottom Layer w6: v1(1415,1712) 1268,1712 968,1412 968,1270 1153,1085 1548,1085 1692.5,1229.5 1783,1225.5 1783,618 1749,584 1749,555 1984,320 S2.1@2267.05,320 ; S2.1@2522.95,320 2395,320 S2.1@2267.05,320 ; v1(2809,1367.29) 2774.21,1332.5 ; P1.4 2884.5,1409.5 2725,1409.5 2612,1296.5 2612,1250 2625,1237 2658,1237 2753.5,1332.5 2774.21,1332.5 ; S2.1@2267.05,320 2357,409.95 2357,996 2418.5,1057.5 2635.1,1057.5 2841,1263.4 2841,1331.5 2840,1332.5 2774.21,1332.5
P2_1/DD: CC2530.35 DEBUG.4 P1.3 | length 3968.7
  Top Layer w6: CC2530.35 2779.84,1331.87 2792.47,1344.5 2855.07,1344.5 2884,1373.43 2884,1509 P1.3
  Bottom Layer w6: DEBUG.4 1810,2230 1810,2261 1827,2278 1827,2335 1833,2341 3682,2341 3723,2300 3723,2237.5 3700.5,2215 3650,2215 3637.5,2227.5 3637.5,2274.97 3600,2312.47 3537,2312.47 3530,2305.47 3530,1883.68 3237.32,1591 2966,1591 P1.3
P2_2/DC: CC2530.34 DEBUG.3 P1.2 R1.2 | length 4496.7
  Top Layer w6: R1.2 1443.12,1745 1618.96,1745 1720,1846.04 1720,2240 DEBUG.3 ; CC2530.34 2799.53,1279 2798.21,1279 2798.21,1331.5 2799.21,1332.5 2907.5,1332.5 P1.2
  Bottom Layer w6: DEBUG.3 1729,2249 1729,2162.5 2067.5,1824 2511,1824 2660,1973 3437.5,1973 3456,1954.5 3456,1842 3222,1608 2802.5,1608 2784.5,1590 2784.5,1492 2785.5,1491 2984,1491 P1.2
PL_DN: CH340.6 R8.1 | length 1379
  Top Layer w6: CH340.6 930,1560 1000,1490 1000,1399.08 1010.11,1388.97 v1(1010.11,1320) ; v1(1838.06,1615.06) R8.1
  Bottom Layer w6: v1(1010.11,1320) 1543,1320 v1(1838.06,1615.06)
PL_DP: CH340.5 R9.1 | length 874.2
  Top Layer w6: CH340.5 980,1714 979,1715 911,1715 910,1714 910,1561 950,1521 950,1417 v1(989,1378) ; v1(1284.81,1378) R9.1
  Bottom Layer w6: v1(989,1378) v1(1284.81,1378)
RESET: CC2530.20 DEBUG.7 P2.3 R11.2 RESET.1 | length 5543
  Top Layer w6: DEBUG.7 1611,2249 1611,2145 1389,1923 1389,1595.31 1393.38,1590.94 1439.25,1590.94 1487.31,1639 1628,1639 1642,1625 1642,1448.38 1690.38,1400 1726.38,1400 R11.2 1770.5,1284 1770.5,1233.57 v1(1737,1200.07) ; CC2530.20 2858.58,986 2925,919.58 P2.3
  Bottom Layer w6: v1(1737,1200.07) 1751,1186.07 1751,893 1737,879 1737,542.15 2000.15,279 3361.05,279 3402.05,320 3657.95,320 3160.95,817 2968,817 P2.3
VBUS: C20.1 F1.1 USB/BAT.1 | length 5892.5
  Top Layer w10: USB/BAT.1 1231.22,120 1394,120 1405,109 1455,109 1456,110 1456,155 1475,174 1767,174 1940,347 F1.1 ; v1(1831,83) 1836,78 3125,78 3145,98 3145,856 3847,1558 3847,1656 3801.31,1701.69 C20.1
  Bottom Layer w10: USB/BAT.1 1268.22,83 v1(1831,83)
VCC: L1.1 R7.2 R12.2 | length 1169.5
  Top Layer w10: L1.1 1387,1033 1428,1033 1497,1102 1497,1122.52 1522.48,1148 1748.79,1148 1839.86,1239.07 1839.86,1399.86 R12.2 1842,1440 v1(1827,1455) ; R7.2 v1(1802,1615)
  Bottom Layer w10: v1(1802,1615) 1826,1639 1848,1639 1862,1625 1862,1490 v1(1827,1455)
VDD3V3: AMS.2 C19.1 C22.1 C24.1 C25.1 CH340.4 CH340.16 DEBUG.2 J1.1 J3.3 P2.2 P2.4 R1.1 R3.1 R4.1 R5.1 R6.1 R10.1 R11.1 R13.1 | length 9310.1
  Top Layer w10: C24.1 964,579 964,1051 933,1082 933,1110 AMS.2 847.75,1110 846.75,1111 846.75,1230 847.99,1231.24 1027.24,1231.24 1102,1306 v1(1102,1501) 1102,1716 1101,1717 1031,1717 1030,1716 CH340.4 ; CH340.16 v1(1180,1501) 1180,1540 1200,1560 1295,1560 R5.1 ; R1.1 1346.84,1696.16 1350,1693 R5.1 ; DEBUG.2 1870,1998 1885,1983 R4.1 1854,1744 1736,1744 R3.1 1660.69,1730.69 1660.69,1479.31 R11.1 1743,1483 1775,1483 ; R13.1 2042,1483 1775,1483 ; P2.2 2982,803 2982,975.91 3411.31,1405.22 C25.1 3467.94,1614.94 3494,1641 3520.06,1641 ; C22.1 3590.25,1641 3520.06,1641 ; C19.1 3616.31,1824.31 3680,1888 J3.3 3761,2189 3761,1896 3677,1812 3677,1752 3657,1732 3611.06,1732 3520.06,1641 ; R5.1 1380.44,1576.94 1486.94,1576.94 R6.1 1525,1527.31 1523.69,1526 R10.1 1523.69,1379.31 1736,1167 1738,1167 1793,1222 1793,1465 1775,1483
  Bottom Layer w10: v1(1102,1501) v1(1180,1501) ; DEBUG.2 1955,2275 J1.1 2416.47,2326.47 3623.53,2326.47 J3.3 ; P2.4 P2.2
VDD5V: AMS.3 C21.1 C23.1 J2.3 USB/BAT.2 | length 6299.3
  Top Layer w10: AMS.3 905,865.5 882.5,843 C23.1 834,641.5 834,399.11 USB/BAT.2 ; v1(3071,213) 3123,265 3123,882 3831,1590 3831,1640 3830,1641 3764.63,1641 C21.1 3763.94,1641.69 3775,1652.75 3775,1837 3827.31,1889.31 3827.31,1985 3818,1994.31 3818,2259 3750,2327 3242,2327 J2.3
  Bottom Layer w10: USB/BAT.2 1175.11,58 1995,58 2150,213 v1(3071,213)
pads on no net: AMS.4 CH340.7 CH340.8 CH340.9 CH340.10 CH340.11 CH340.12 CH340.13 CH340.14 CH340.15 DEBUG.9 USB1.4 USB1.10 USB1.11 USB/BAT.0

## Polygon pours and split planes (outlines as drawn)
GND on Top Layer "TopPoly" (solid, remove dead copper, pour order 4): 5,0 3935,0 3935,2360 0,2360
GND on Bottom Layer "BottomPoly" (solid, remove dead copper, pour order 6): 5,0 3935,0 3935,2360 0,2360

## Silkscreen, mask and mechanical layers (free items; w line width, h text height)
Top Overlay:
  text "GND" at 2415,2150 h50
  text "P05" at 2530,2150 h50
  text "P06" at 2630,2150 h50
  text "P04" at 2955,2150 h50
  text "GND" at 3045,2150 h50
  text "5V" at 3165,2150 h50
  text "GND" at 3430,2150 h50
  text "P07" at 3545,2150 h50
  text "3V3" at 3645,2150 h50
  text "3V3" at 2310,2145 h60
Bottom Overlay:
  text "CQUPT" at 490,1020 h100 r270
  text "Narcissus" at 705,875 h100 r270
  text "2018212865" at 290,810 h100 r270
Mechanical 1:
  the board outline again, w10

## Text inside footprints (layer, text, board x,y; h text height)
P1: Top Overlay "2" at 3100,1435 h40; Top Overlay "1" at 3100,1535 h40; Top Overlay "11" at 2400,1530 h40; Top Overlay "12" at 2400,1435 h40
P2: Top Overlay "2" at 3100,745 h40; Top Overlay "1" at 3105,840 h40; Top Overlay "11" at 2400,845 h40; Top Overlay "12" at 2400,750 h40